# Allegro board demob2.brd
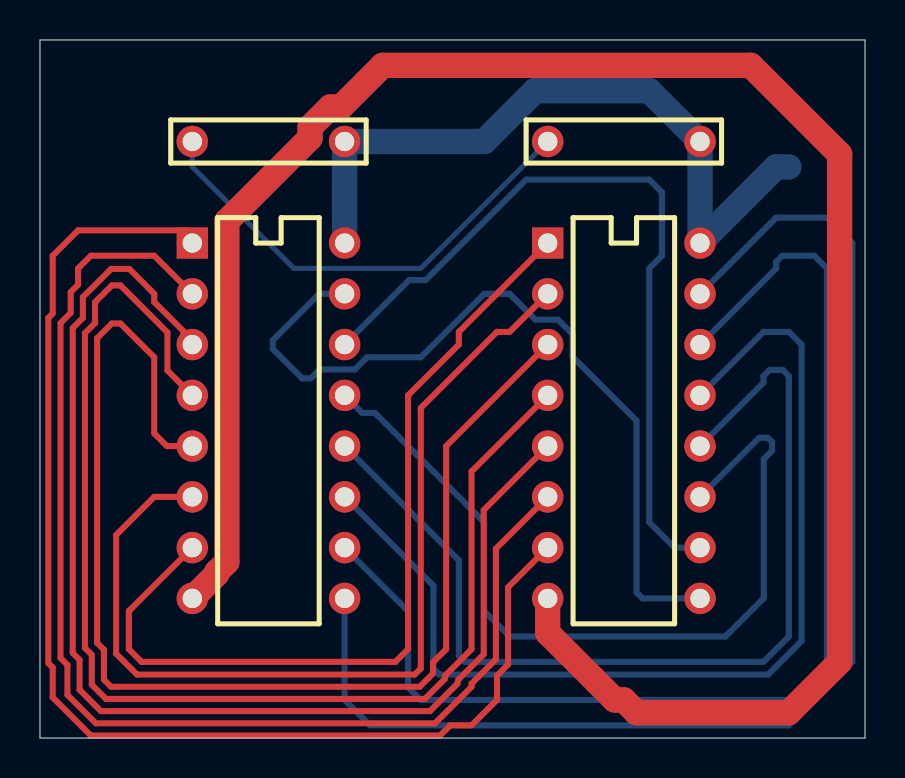
[diagram p0: board, top side]
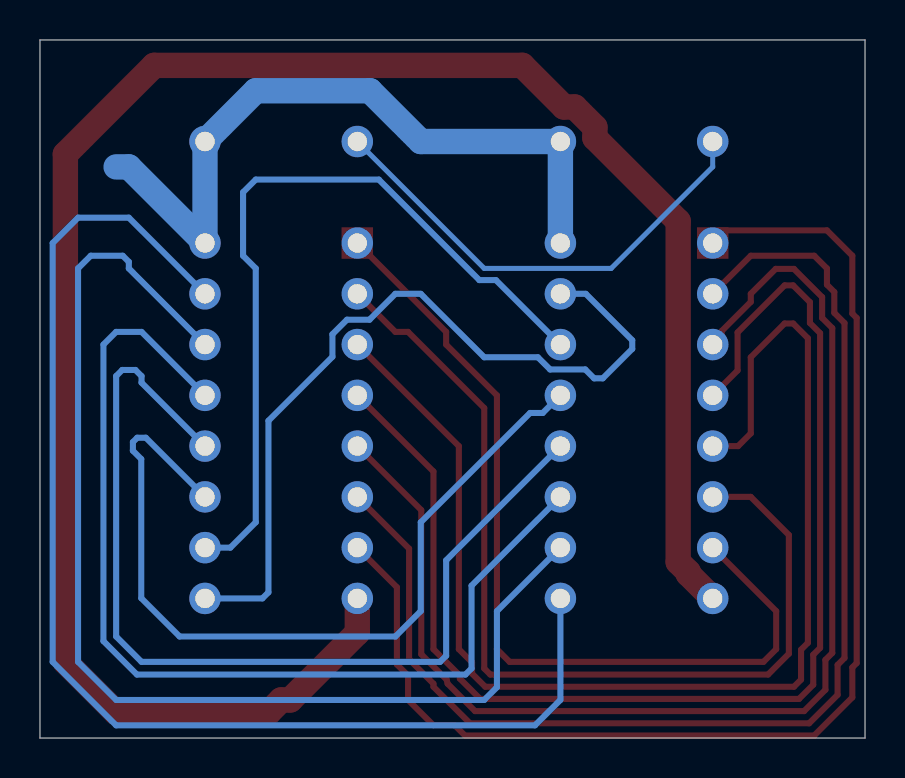
[diagram p1: board, bottom side, seen from below]

Outline 41.27 x 34.93 mm; copper layers: TOP, GND, POWER, INNER1, INNER2, BOTTOM. Coordinates in mm from the lower left corner of the outline.
Outline path: 0,34.93 41.27,34.93 41.27,0 0,0 0,34.93

## Design rules (mm)
nets with their own width: min track width 0.254; nets GND_SIGNAL
nets with their own width: min track width 0.305; nets N01899 N01900 N01901 N01902 N01903 N01904 N01905 N01906 N01907 N01908 N01909 N01910 N01911 N01912
nets with their own width: min track width 1.27; nets GND VCC

## Placement (name value [footprint] x y rotation side)
C1  CAP NP  [AC300100A]  15.24 29.85 180 top
C2  CAP NP  [AC300100A]  33.02 29.85 180 top
U1  74LS158  [DIP16]  7.62 24.77 270 top
U2  74LS158  [DIP16]  25.4 24.77 270 top

## Library data of the parts
C1 C2 = CAP_NP
U1 U2 = 74LS158

## Footprints (pads in the part's own frame, mm; a bottom-side part is the same pattern mirrored in y, then rotated)
AC300100A
  round 1.575 hole 0.965: 1(0,0) 2(7.62,0)
DIP16
  rect 1.575x1.575 hole 0.965: 1(0,0)
  round 1.575 hole 0.965: 2(2.54,0) 3(5.08,0) 4(7.62,0) 5(10.16,0) 6(12.7,0) 7(15.24,0) 8(17.78,0) 9(17.78,7.62) 10(15.24,7.62) 11(12.7,7.62) 12(10.16,7.62) 13(7.62,7.62) 14(5.08,7.62) 15(2.54,7.62) 16(0,7.62)

## Nets
GND: U1.8(TP-8) U2.8(TP-8)
GND_SIGNAL: C1.2(TP-2) C2.2(TP-2)
VCC: C1.1(TP-1) C2.1(TP-1) U1.16(TP-16) U2.16(TP-16)
N01899: U1.2(TP-2) U2.6(TP-6)
N01900: U1.3(TP-3) U2.5(TP-5)
N01901: U1.4(TP-4) U2.4(TP-4)
N01902: U1.5(TP-5) U2.3(TP-3)
N01903: U1.6(TP-6) U2.2(TP-2)
N01904: U1.7(TP-7) U2.1(TP-1)
N01905: U1.9(TP-9) U2.15(TP-15)
N01906: U1.10(TP-10) U2.14(TP-14)
N01907: U1.11(TP-11) U2.13(TP-13)
N01908: U1.12(TP-12) U2.12(TP-12)
N01909: U1.14(TP-14) U2.10(TP-10)
N01910: U1.1(TP-1) U2.7(TP-7)
N01911: U1.13(TP-13) U2.11(TP-11)
N01912: U1.15(TP-15) U2.9(TP-9)

## Routing (per net, layer and track width the routed paths; a pad name or vN(x,y) marks a point on that pad's centre or on a via; arc(x,y) is an arc through that point)
GND: length 100.1
  TOP w1.27: U2.8 25.4,5.26 28.75,1.91 29.21,1.91 29.84,1.27 37.47,1.27 40.01,3.81 40.01,29.21 35.56,33.66 17.14,33.66 15.06,31.57 14.52,31.57 13.51,30.56 13.51,30.02 9.35,25.86 9.35,8.81 8.84,8.3 8.84,8.21 U1.8
GND_SIGNAL: length 23.8
  BOTTOM w0.254: C1.2 7.62,28.57 12.7,23.5 19.05,23.5 C2.2
VCC: length 36.1
  BOTTOM w1.27: 37.47,28.57 36.83,28.57 U2.16 C2.1 30.48,32.39 24.77,32.39 22.23,29.85 C1.1 U1.16
N01899: length 61.3
  TOP w0.305: U1.2 5.71,24.13 2.54,24.13 1.91,23.5 1.91,22.68 1.54,22.31 1.54,21.27 1.03,20.76 1.03,4 1.37,3.66 1.37,2.16 2.79,0.74 19.76,0.74 20.93,1.91 21.59,2.56 21.59,2.72 22.81,3.94 22.81,9.47 U2.6
N01900: length 61.7
  TOP w0.305: U1.3 7.17,20.13 7.17,20.36 5.71,21.82 5.71,22.22 4.47,23.47 3.56,23.47 2.15,22.06 2.15,21.02 1.64,20.51 1.64,4.25 1.98,3.91 1.98,2.41 3.05,1.35 19.51,1.35 20.88,2.72 20.93,2.92 22.2,4.19 22.2,11.4 U2.5
N01901: length 62.8
  TOP w0.305: U2.4 21.59,13.34 21.59,4.45 20.27,3.12 20.27,2.97 19.25,1.96 3.3,1.96 2.59,2.67 2.59,4.17 2.25,4.51 2.25,20.26 2.76,20.76 2.76,21.81 3.6,22.65 4.02,22.65 6.38,20.29 6.38,18.39 U1.4
N01902: length 62.8
  TOP w0.305: U2.3 20.32,14.61 20.32,4.45 19.66,3.78 19.66,3.23 19,2.57 3.56,2.57 3.2,2.92 3.2,4.42 2.86,4.76 2.86,20 3.59,20.74 4.03,20.74 5.71,19.05 5.71,15.24 6.35,14.61 U1.5
N01903: length 48.1
  TOP w0.305: U2.2 23.5,20.32 22.86,20.32 19.05,16.51 19.05,3.48 18.75,3.17 4.85,3.17 3.81,4.22 3.81,10.16 5.71,12.07 U1.6
N01904: length 44.1
  TOP w0.305: U1.7 4.45,6.35 4.45,4.45 5.08,3.81 17.78,3.81 18.41,4.45 18.41,17.14 20.95,19.68 20.95,20.32 U2.1
N01905: length 63
  BOTTOM w0.305: U2.15 36.83,26.04 39.37,26.04 40.64,24.77 40.64,3.81 37.47,0.64 16.51,0.64 15.24,1.91 U1.9
N01906: length 58.6
  BOTTOM w0.305: U1.10 18.41,6.35 18.41,2.54 19.05,1.91 37.47,1.91 39.37,3.81 39.37,23.5 38.73,24.13 37.13,24.13 36.83,23.83 36.83,23.5 U2.14
N01907: length 51.2
  BOTTOM w0.305: U2.13 36.2,20.32 37.47,20.32 38.1,19.68 38.1,4.85 36.42,3.17 19.99,3.17 19.68,3.48 19.68,7.62 U1.11
N01908: length 49.4
  BOTTOM w0.305: U2.12 36.2,17.78 36.2,18.11 36.5,18.41 37.16,18.41 37.47,18.11 37.47,5.08 36.2,3.81 21.26,3.81 20.95,4.11 20.95,8.89 U1.12
N01909: length 39.4
  BOTTOM w0.305: U2.10 31.75,9.52 30.48,10.8 30.48,23.5 31.11,24.13 31.11,27.3 30.48,27.94 24.32,27.94 19.29,22.91 18.47,22.91 U1.14
N01910: length 62.7
  TOP w0.305: U1.1 7.62,25.1 7.32,25.4 1.91,25.4 0.64,24.13 0.64,21.23 0.42,21.02 0.42,3.75 0.64,3.53 0.64,2.03 2.54,0.13 20.02,0.13 20.53,0.64 21.59,0.64 22.86,1.91 22.86,3.12 23.42,3.68 23.42,7.54 U2.7
N01911: length 42.3
  BOTTOM w0.305: U1.13 16.12,16.26 16.76,16.26 22.23,10.8 22.23,6.35 23.5,5.08 34.29,5.08 36.21,7 36.21,13.96 36.63,14.38 36.63,14.81 36.41,15.02 35.98,15.02 U2.11
N01912: length 40.7
  BOTTOM w0.305: U1.15 13.97,22.22 11.65,19.9 11.65,19.47 13.12,18 13.55,18 14,18.44 15.76,18.44 16.37,19.05 19.05,19.05 22.23,22.22 23.5,22.22 24.79,20.93 25.92,20.93 26.64,20.2 26.64,19.07 29.84,15.88 29.84,7.29 30.15,6.99 U2.9
